# Altium PCB ACDC.PcbDoc (part 2 of 2)
Units mil, origin at the board's own origin, x right, y up, seen from the top; angles counter-clockwise.
Board outline 4750 x 3250 mil, 4 copper layers (Top Layer, Layer 1, Layer 2, Bottom Layer), stack 23.756 mil thick; 82 components, 68 nets, 464 pads, 343 vias.
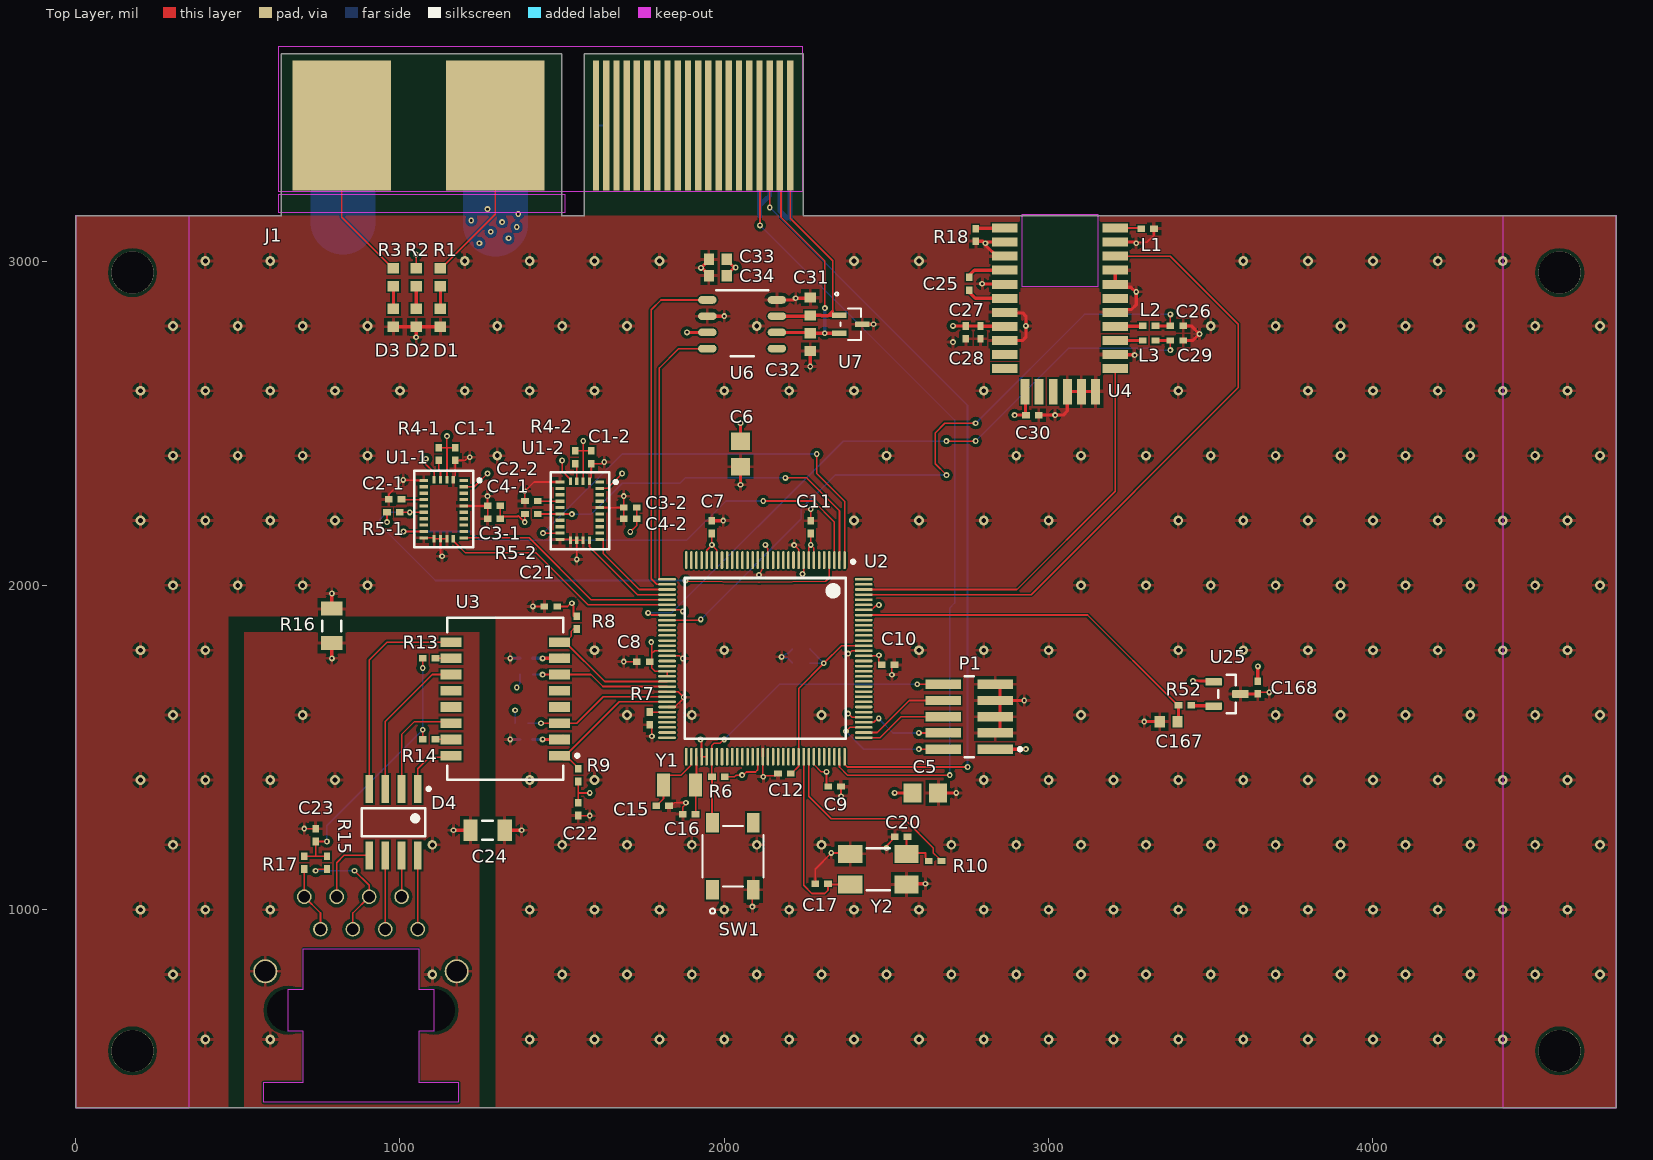
[diagram p0: Top Layer view]

## Polygon pours and split planes (outlines as drawn) (continued)
GND on Layer 1 (split plane): 2223.77,3139.5 2224.15,3135.58 2225.3,3131.81 2227.16,3128.34 2229.65,3125.29 2232.7,3122.79 2236.17,3120.94 2239.94,3119.79 2243.86,3119.41 4730.4,3119.41 4730.4,409.6 1295.05,409.6 1295.08,410 1295.08,1880 1294.77,1883.92 1293.85,1887.75 1292.34,1891.38 1290.29,1894.74 1287.73,1897.73 1284.74,1900.29 1281.38,1902.34 1277.75,1903.85 1273.92,1904.77 1270,1905.08 495,1905.08 491.08,1904.77 487.25,1903.85 483.62,1902.34 480.26,1900.29 477.27,1897.73 474.71,1894.74 472.66,1891.38 471.15,1887.75 470.23,1883.92 469.92,1880 469.92,410 469.95,409.6 20.6,409.6 20.6,3119.41 633.87,3119.41 637.79,3119.79 641.56,3120.94 645.03,3122.79 648.08,3125.29 650.57,3128.34 652.43,3131.81 653.58,3135.58 653.96,3139.5 653.96,3619.41 1478.77,3619.41 1478.77,3139.5 1479.15,3135.58 1480.3,3131.81 1482.16,3128.34 1484.65,3125.29 1487.7,3122.79 1491.17,3120.94 1494.94,3119.79 1498.87,3119.41 1568.87,3119.41 1572.79,3119.79 1576.56,3120.94 1580.03,3122.79 1583.08,3125.29 1585.57,3128.34 1587.43,3131.81 1588.58,3135.58 1588.96,3139.5 1588.96,3619.41 2223.77,3619.41
CGND on Layer 1 (split plane): 1244.92,410 1244.95,409.6 1200.59,409.6 1200.59,468 1200.21,471.92 1199.06,475.69 1197.21,479.17 1194.71,482.21 1191.66,484.71 1188.19,486.57 1184.42,487.71 1180.5,488.1 1077.59,488.1 1077.59,604.9 1105,604.9 1108.92,605.29 1112.69,606.43 1116.16,608.29 1119.21,610.79 1121.71,613.83 1123.56,617.31 1124.71,621.08 1125.09,625 1125.09,755 1124.71,758.92 1123.56,762.69 1121.71,766.17 1119.21,769.21 1116.16,771.71 1112.69,773.57 1108.92,774.71 1105,775.1 1077.59,775.1 1077.59,879 1077.21,882.92 1076.06,886.69 1074.21,890.17 1071.71,893.21 1068.66,895.71 1065.19,897.57 1061.42,898.71 1057.5,899.1 702.5,899.1 698.58,898.71 694.81,897.57 691.33,895.71 688.29,893.21 685.79,890.17 683.93,886.69 682.79,882.92 682.4,879 682.4,775.1 655,775.1 651.08,774.71 647.31,773.57 643.83,771.71 640.79,769.21 638.29,766.17 636.43,762.69 635.29,758.92 634.9,755 634.9,625 635.29,621.08 636.43,617.31 638.29,613.83 640.79,610.79 643.83,608.29 647.31,606.43 651.08,605.29 655,604.9 682.4,604.9 682.4,488.1 579.5,488.1 575.58,487.71 571.81,486.57 568.33,484.71 565.29,482.21 562.79,479.17 560.93,475.69 559.79,471.92 559.4,468 559.4,409.6 520.05,409.6 520.08,410 520.08,1854.92 1244.92,1854.92

## Keep-outs
Keep-Out Layer:
  rectangle: 0,390 350,3140
  rectangle: 4400,390 4750,3140

## Other copper
Layer 1 (plane layer: these items are gaps in the copper):
  lines w50: 495,410 495,1880 1270,1880 1270,410
Layer 2 (plane layer: these items are gaps in the copper):
  lines w50: 500,410 500,1880 530,1880 ; 525,1880 1265,1880 ; 1270,410 1270,1880

## Silkscreen, mask and mechanical layers (free items; w line width, h text height)
Top Solder:
  rectangle: 1055,2130 1215,2340
  rectangle: 1475,2120 1635,2340
  rectangle: 1880,2050 2370,2105
  rectangle: 1795,1525 1850,2025
  rectangle: 1875,1445 2380,1500
  rectangle: 2400,1525 2460,2025
Bottom Solder:
  rectangle: 2190,1740 2280,1825